# EAGLE board main (EAGLE 7.5.0)

Size 160 x 100 mm. Coordinates in mm from the lower left corner, seen from the top.
Outline: 0,0 160,0 160,100 0,100 0,0
Copper layers (1*16): Top 0.035mm / dielectric 1.5mm / Bottom 0.035mm
Design rules "default": minimum track width 10mil, minimum drill 24mil, track to track 8mil, track to pad 8mil, pad to pad 8mil, via to via 8mil, smd to smd 8mil, copper to edge 40mil, drill to drill 8mil, minimum pad ring 10mil, minimum via ring 8mil, stop-mask expansion 4mil, vias tented up to drill 0mil, thermal gap 10mil

## Footprints (pad centres in the part's own frame; a part is rotated, then mirrored left to right if it is on the bottom)
C050-024X044 = drill 0.813 octagon: 1 -2.54,0; 2 2.54,0
DIL16 = drill 0.813 long: 1 -8.89,-3.81; 2 -6.35,-3.81; 3 -3.81,-3.81; 4 -1.27,-3.81; 5 1.27,-3.81; 6 3.81,-3.81; 7 6.35,-3.81; 8 8.89,-3.81; 9 8.89,3.81; 10 6.35,3.81; 11 3.81,3.81; 12 1.27,3.81; 13 -1.27,3.81; 14 -3.81,3.81; 15 -6.35,3.81; 16 -8.89,3.81
TO220V = drill 1.016 long: 1 -2.54,-2.54; 2 0,-2.54; 3 2.54,-2.54
AUDIO-JACK-.25-INCH-SWCRAFT = drill 1.27 octagon: S 19.05,1.27; T 6.35,7.62; TS 11.43,5.08 | hole 2.438: 3.81,1.27; 16.51,-2.54; 16.51,5.08
POWER_JACK_PTH = drill 2.997 pad 4.318: GND 0,7.7; GNDBREAK 4.7,10.7; PWR 0,13.7
2X10 = drill 1.016 octagon: 1 -11.43,-1.27; 2 -11.43,1.27; 3 -8.89,-1.27; 4 -8.89,1.27; 5 -6.35,-1.27; 6 -6.35,1.27; 7 -3.81,-1.27; 8 -3.81,1.27; 9 -1.27,-1.27; 10 -1.27,1.27; 11 1.27,-1.27; 12 1.27,1.27; 13 3.81,-1.27; 14 3.81,1.27; 15 6.35,-1.27; 16 6.35,1.27; 17 8.89,-1.27; 18 8.89,1.27; 19 11.43,-1.27; 20 11.43,1.27
TQ2 = drill 1: 1 -5.08,-3.81; 2 -2.54,-3.81; 3 0,-3.81; 4 2.54,-3.81; 5 5.08,-3.81; 6 5.08,3.81; 7 2.54,3.81; 8 0,3.81; 9 -2.54,3.81; 10 -5.08,3.81
LED5MM = drill 0.813 octagon: A -1.27,0; K 1.27,0
0204/7 = drill 0.813 octagon: 1 -3.81,0; 2 3.81,0
SWITCH_SPST_OFFBOARD = drill 1.016 pad 1.88: 2 1.905,0; 3 -1.905,0
DIL28-6 = drill 0.813 long: 1 -16.51,-7.62; 2 -13.97,-7.62; 3 -11.43,-7.62; 4 -8.89,-7.62; 5 -6.35,-7.62; 6 -3.81,-7.62; 7 -1.27,-7.62; 8 1.27,-7.62; 9 3.81,-7.62; 10 6.35,-7.62; 11 8.89,-7.62; 12 11.43,-7.62; 13 13.97,-7.62; 14 16.51,-7.62; 15 16.51,7.62; 16 13.97,7.62; 17 11.43,7.62; 18 8.89,7.62; 19 6.35,7.62; 20 3.81,7.62; 21 1.27,7.62; 22 -1.27,7.62; 23 -3.81,7.62; 24 -6.35,7.62; 25 -8.89,7.62; 26 -11.43,7.62; 27 -13.97,7.62; 28 -16.51,7.62

## Placement (x,y rotation side)
C1  0.1u  [C050-024X044]  -67.31,95.25 0 top  (outside the outline)
C2  .1u  [C050-024X044]  -74.93,95.25 0 top  (outside the outline)
C3  .1u  [C050-024X044]  -82.55,95.25 0 top  (outside the outline)
C4  0.33u  [C050-024X044]  -90.17,95.25 0 top  (outside the outline)
C5  0.33u  [C050-024X044]  -97.79,95.25 0 top  (outside the outline)
C6  0.1u  [C050-024X044]  -16.51,102.87 0 top  (outside the outline)
C7  0.1u  [C050-024X044]  -24.13,102.87 0 top  (outside the outline)
C8  0.1u  [C050-024X044]  -31.75,102.87 0 top  (outside the outline)
IC1  74LS139N  [DIL16]  -24.13,74.93 0 top  (outside the outline)
IC2  74LS148N  [DIL16]  -46.99,74.93 0 top  (outside the outline)
IC3  7805TV  [TO220V]  -63.5,90.17 0 top  (outside the outline)
IC4  74LS279N  [DIL16]  -69.85,74.93 0 top  (outside the outline)
IN  AUDIO-JACK-NORM-TS  [AUDIO-JACK-.25-INCH-SWCRAFT]  135.89,63.5 0 top
J1  POWER_JACKPTH  [POWER_JACK_PTH]  160.02,48.26 90 top
JTAG/SWD1  [2X10]  -93.98,83.82 0 top  (outside the outline)
K1  TQ2-L-5V  [TQ2]  -90.17,73.66 0 top  (outside the outline)
K2  TQ2-L-5V  [TQ2]  -20.32,86.36 0 top  (outside the outline)
K3  TQ2-L-5V  [TQ2]  -35.56,86.36 0 top  (outside the outline)
K4  TQ2-L-5V  [TQ2]  -50.8,86.36 0 top  (outside the outline)
LED1  [LED5MM]  -21.59,95.25 0 top  (outside the outline)
LED2  [LED5MM]  -34.29,95.25 0 top  (outside the outline)
LED3  [LED5MM]  -46.99,95.25 0 top  (outside the outline)
LED4  [LED5MM]  -59.69,95.25 0 top  (outside the outline)
OUT  AUDIO-JACK-NORM-TS  [AUDIO-JACK-.25-INCH-SWCRAFT]  25.4,66.04 180 top
R1  AUDIO-JACK-NORM-TS  [AUDIO-JACK-.25-INCH-SWCRAFT]  132.08,74.93 90 top
R2  AUDIO-JACK-NORM-TS  [AUDIO-JACK-.25-INCH-SWCRAFT]  91.44,74.93 90 top
R3  AUDIO-JACK-NORM-TS  [AUDIO-JACK-.25-INCH-SWCRAFT]  50.8,74.93 90 top
R4  AUDIO-JACK-NORM-TS  [AUDIO-JACK-.25-INCH-SWCRAFT]  10.16,74.93 90 top
R5  4.7K  [0204/7]  -17.78,107.95 0 top  (outside the outline)
R6  4.7K  [0204/7]  -27.94,107.95 0 top  (outside the outline)
R7  4.7K  [0204/7]  -38.1,107.95 0 top  (outside the outline)
R8  4.7K  [0204/7]  -48.26,107.95 0 top  (outside the outline)
R9  4.7K  [0204/7]  -58.42,107.95 0 top  (outside the outline)
R10  2.2k  [0204/7]  -68.58,107.95 0 top  (outside the outline)
R11  50  [0204/7]  -78.74,107.95 0 top  (outside the outline)
R12  50  [0204/7]  -88.9,107.95 0 top  (outside the outline)
R13  50  [0204/7]  -99.06,107.95 0 top  (outside the outline)
R14  4.7K  [0204/7]  -17.78,111.76 0 top  (outside the outline)
R15  4.7K  [0204/7]  -27.94,111.76 0 top  (outside the outline)
S1  AUDIO-JACK-NORM-TS  [AUDIO-JACK-.25-INCH-SWCRAFT]  152.4,74.93 90 top
S2  AUDIO-JACK-NORM-TS  [AUDIO-JACK-.25-INCH-SWCRAFT]  111.76,74.93 90 top
S3  AUDIO-JACK-NORM-TS  [AUDIO-JACK-.25-INCH-SWCRAFT]  71.12,74.93 90 top
S4  AUDIO-JACK-NORM-TS  [AUDIO-JACK-.25-INCH-SWCRAFT]  30.48,74.93 90 top
SW0  SWITCH-SPST  [SWITCH_SPST_OFFBOARD]  -39.37,100.33 0 top  (outside the outline)
SW1  SWITCH-SPST  [SWITCH_SPST_OFFBOARD]  -48.26,100.33 0 top  (outside the outline)
SW2  SWITCH-SPST  [SWITCH_SPST_OFFBOARD]  -57.15,100.33 0 top  (outside the outline)
SW3  SWITCH-SPST  [SWITCH_SPST_OFFBOARD]  -66.04,100.33 0 top  (outside the outline)
SW4  SWITCH-SPST  [SWITCH_SPST_OFFBOARD]  -74.93,100.33 0 top  (outside the outline)
SW5  SWITCH-SPST  [SWITCH_SPST_OFFBOARD]  -83.82,100.33 0 top  (outside the outline)
SW6  SWITCH-SPST  [SWITCH_SPST_OFFBOARD]  -92.71,100.33 0 top  (outside the outline)
SW7  SWITCH-SPST  [SWITCH_SPST_OFFBOARD]  -101.6,100.33 0 top  (outside the outline)
U1  LPC1114FN28/102  [DIL28-6]  124.46,52.07 270 top
U2  UA78MC  [TO220V]  -74.93,90.17 0 top  (outside the outline)

## Library data of the parts
C1-C8 = rcl
IC1 IC2 IC4 = 74xx-us
IC3 = linear
IN OUT R1-R4 S1-S4 = SparkFun-Connectors
J1 = SparkFun-Connectors; PROD_ID: CONN-08197
JTAG/SWD1 = pinhead
K1-K4 = relay; MF: AROMAT/ MATSUSHITA; MPN: TQ2-L-5V; OC_FARNELL: 1448361; OC_NEWARK: 64K3191
LED1-LED4 = led
R5-R15 = resistor
SW0 SW1-SW7 = SparkFun-Switches
U1 U2 = lpc_11xx

## Nets
+3V3: C1.1 C2.1 C3.1 C7.1 C8.1 JTAG/SWD1.1 U1.7 U1.21 U2.3
+5V: C6.1 IC3.3 R5.1 R6.1 R7.1 R8.1 R9.1 R10.2 R11.2 R12.2 R13.2 R14.1 R15.1
GND: C1.2 C2.2 C3.2 C4.2 C5.2 C6.2 C7.2 C8.2 IC1.8 IC2.5 IC2.8 IC2.10 IC3.2 IC4.8 IN.S J1.PWR JTAG/SWD1.4 JTAG/SWD1.6 JTAG/SWD1.8 JTAG/SWD1.10 JTAG/SWD1.12 JTAG/SWD1.14 JTAG/SWD1.16 JTAG/SWD1.18 JTAG/SWD1.20 OUT.S R1.S R2.S R3.S R4.S S1.S S2.S S3.S S4.S SW0.3 SW1.3 SW2.3 SW3.3 SW4.3 SW5.3 SW6.3 SW7.3 U1.8 U1.22 U2.2
N$1: U1.15
N$2: C4.1 C5.1 IC3.1 J1.GND U2.1
N$3: U1.16
N$4: IC2.11 R8.2 SW1.2
N$5: IC1.3 IC1.13 U1.18
N$6: IC1.15 U1.13
N$7: IC1.1 U1.14
N$8: IC1.10 IC4.5 K3.1
N$9: IC1.4 IC4.2 IC4.3 K1.10
N$10: IC1.5 IC4.11 IC4.12 K2.10
N$11: IC1.11 IC4.10 K2.1
N$12: IC1.6 IC4.6 K3.10
N$14: IC1.7 IC4.15 K4.10
N$15: IC1.9 IC4.14 K4.1
N$16: IC1.12 IC4.1 K1.1
N$17: IC4.4 LED1.K
N$18: IC4.9 LED2.K
N$19: IC4.7 LED3.K
N$20: IC4.13 LED4.K
N$21: LED1.A R10.1
N$22: LED2.A R11.1
N$23: LED3.A R12.1
N$24: LED4.A R13.1
N$25: IC1.2 IC1.14 U1.17
N$26: IC2.12 R15.2 SW2.2
N$27: IC2.13 R7.2 SW3.2
N$28: IC2.1 R14.2 SW4.2
N$29: IC2.2 R6.2 SW5.2
N$30: IC2.3 R9.2 SW6.2
N$31: IC2.4 R5.2 SW7.2
N$32: IN.T K1.3 R1.TS
N$33: K1.2 K1.9
N$34: K1.7 R1.T
N$35: K1.4 S1.T
N$36: K1.8 K2.3 R2.TS
N$37: K2.2 K2.9
N$38: K2.4 S2.T
N$39: K2.7 R2.T
N$40: K2.8 K3.3 R3.TS
N$41: K3.4 S3.T
N$42: K3.2 K3.9
N$43: K3.7 R3.T
N$44: IC2.9 U1.9
N$45: K3.8 K4.3 R4.TS
N$46: K4.2 K4.9
N$47: K4.4 S4.T
N$48: K4.7 R4.T
N$49: IC2.7 U1.10
N$50: K4.8 OUT.T
N$51: IC2.6 U1.11
N$52: SW0.2 U1.6
RESET: JTAG/SWD1.15 U1.23
SWCLK: JTAG/SWD1.9 U1.3
SWDIO: JTAG/SWD1.7 U1.12
VCC: IC1.16 IC2.16 IC4.16

## Tracks (layer width: path | path; a pad name or v marks a point on that pad's centre or on a via)
+3V3  (8 unrouted)
+5V  (12 unrouted)
GND  (44 unrouted)
N$2  (4 unrouted)
N$4  (2 unrouted)
N$5  (2 unrouted)
N$6  (1 unrouted)
N$7  (1 unrouted)
N$8  (2 unrouted)
N$9  (3 unrouted)
N$10  (3 unrouted)
N$11  (2 unrouted)
N$12  (2 unrouted)
N$14  (2 unrouted)
N$15  (2 unrouted)
N$16  (2 unrouted)
N$17  (1 unrouted)
N$18  (1 unrouted)
N$19  (1 unrouted)
N$20  (1 unrouted)
N$21  (1 unrouted)
N$22  (1 unrouted)
N$23  (1 unrouted)
N$24  (1 unrouted)
N$25  (2 unrouted)
N$26  (2 unrouted)
N$27  (2 unrouted)
N$28  (2 unrouted)
N$29  (2 unrouted)
N$30  (2 unrouted)
N$31  (2 unrouted)
N$32  (2 unrouted)
N$33  (1 unrouted)
N$34  (1 unrouted)
N$35  (1 unrouted)
N$36  (2 unrouted)
N$37  (1 unrouted)
N$38  (1 unrouted)
N$39  (1 unrouted)
N$40  (2 unrouted)
N$41  (1 unrouted)
N$42  (1 unrouted)
N$43  (1 unrouted)
N$44  (1 unrouted)
N$45  (2 unrouted)
N$46  (1 unrouted)
N$47  (1 unrouted)
N$48  (1 unrouted)
N$49  (1 unrouted)
N$50  (1 unrouted)
N$51  (1 unrouted)
N$52  (1 unrouted)
RESET  (1 unrouted)
SWCLK  (1 unrouted)
SWDIO  (1 unrouted)
VCC  (2 unrouted)